# EAGLE board DIP16-2-2.54 (EAGLE 9.7.0)
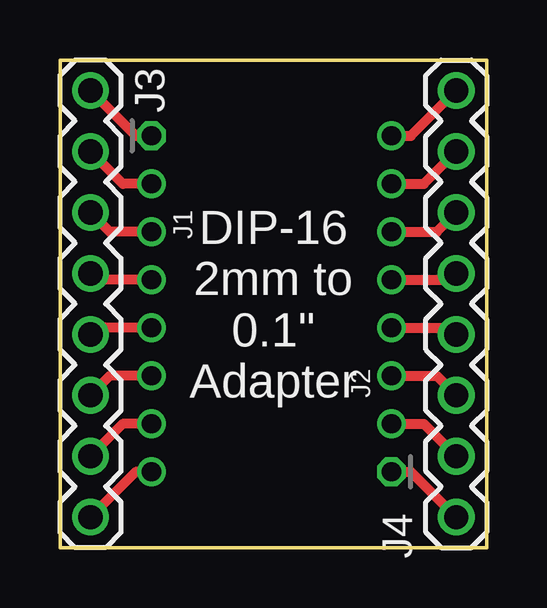
[diagram p0: board, top side]

Size 17.78 x 20.32 mm. Coordinates in mm from the lower left corner, seen from the top.
Outline: 17.78,0 0,0 0,20.32 17.78,20.32 17.78,0
Copper layers (1*16): Top 0.035mm / dielectric 1.5mm / Bottom 0.035mm
Design rules "SuperHouse-Design-Rules *": minimum track width 10mil, minimum drill 24mil, track to track 8mil, track to pad 8mil, pad to pad 8mil, via to via 8mil, smd to smd 6mil, copper to edge 0.4mm, drill to drill 8mil, minimum pad ring 7mil, minimum via ring 8mil, stop-mask expansion 4mil, vias tented up to drill 0.5mm, thermal gap 10mil
Net classes: 0 Default: width 0.203 mm; 1 VCC: width 0.305 mm

## Footprints (pad centres in the part's own frame; a part is rotated, then mirrored left to right if it is on the bottom)
1X8-2.00-S = drill 0.8 octagon: 1 -7,0 | drill 0.8: 2 -5,0; 3 -3,0; 4 -1,0; 5 1,0; 6 3,0; 7 5,0; 8 7,0
1X08-P-BELOW = drill 1.016: 1 -8.89,0; 2 -6.35,0; 3 -3.81,0; 4 -1.27,0; 5 1.27,0; 6 3.81,0; 7 6.35,0; 8 8.89,0

## Placement (x,y rotation side)
J1  A  [1X8-2.00-S]  3.81,10.16 270 top
J2  A  [1X8-2.00-S]  13.81,10.16 90 top
J3  M08-PIN-BELOW  [1X08-P-BELOW]  1.27,10.16 270 top
J4  M08-PIN-BELOW  [1X08-P-BELOW]  16.51,10.16 90 top

## Library data of the parts
J1-J4 = SuperHouse-Connectors

## Nets
N$1: J1.1 J3.1
N$2: J1.2 J3.2
N$3: J1.3 J3.3
N$4: J1.4 J3.4
N$5: J1.5 J3.5
N$6: J1.6 J3.6
N$7: J1.7 J3.7
N$8: J1.8 J3.8
N$9: J2.1 J4.1
N$10: J2.2 J4.2
N$11: J2.3 J4.3
N$12: J2.4 J4.4
N$13: J2.5 J4.5
N$14: J2.6 J4.6
N$15: J2.7 J4.7
N$16: J2.8 J4.8

## Tracks (layer width: path | path; a pad name or v marks a point on that pad's centre or on a via)
N$1
  Top 0.406: J1.1 3.16,17.16 J3.1
N$2
  Top 0.406: J1.2 2.62,15.16 J3.2
N$3
  Top 0.406: J1.3 2.08,13.16 J3.3
N$4
  Top 0.406: J1.4 1.54,11.16 J3.4
N$5
  Top 0.406: J1.5 1.54,9.16 J3.5
N$6
  Top 0.406: J1.6 2.08,7.16 J3.6
N$7
  Top 0.406: J1.7 2.62,5.16 J3.7
N$8
  Top 0.406: J1.8 3.16,3.16 J3.8
N$9
  Top 0.406: J2.1 14.62,3.16 J4.1
N$10
  Top 0.406: J2.2 15.16,5.16 J4.2
N$11
  Top 0.406: J2.3 15.7,7.16 J4.3
N$12
  Top 0.406: J2.4 16.24,9.16 J4.4
N$13
  Top 0.406: J2.5 16.24,11.16 J4.5
N$14
  Top 0.406: J2.6 15.7,13.16 J4.6
N$15
  Top 0.406: J2.7 15.16,15.16 J4.7
N$16
  Top 0.406: J2.8 14.62,17.16 J4.8

## Text on the board
tPlace: DIP-16 / 2mm to / 0.1" / Adapter